# Altium PCB isoUSBtoUART.PcbDoc
Units mm, origin at the board's own origin, x right, y up, seen from the top; angles counter-clockwise.
Board outline 43 x 14 mm, 2 copper layers (Component Side, Bottom Layer), stack 2.38 mm thick; 17 components, 23 nets, 95 pads, 41 vias.
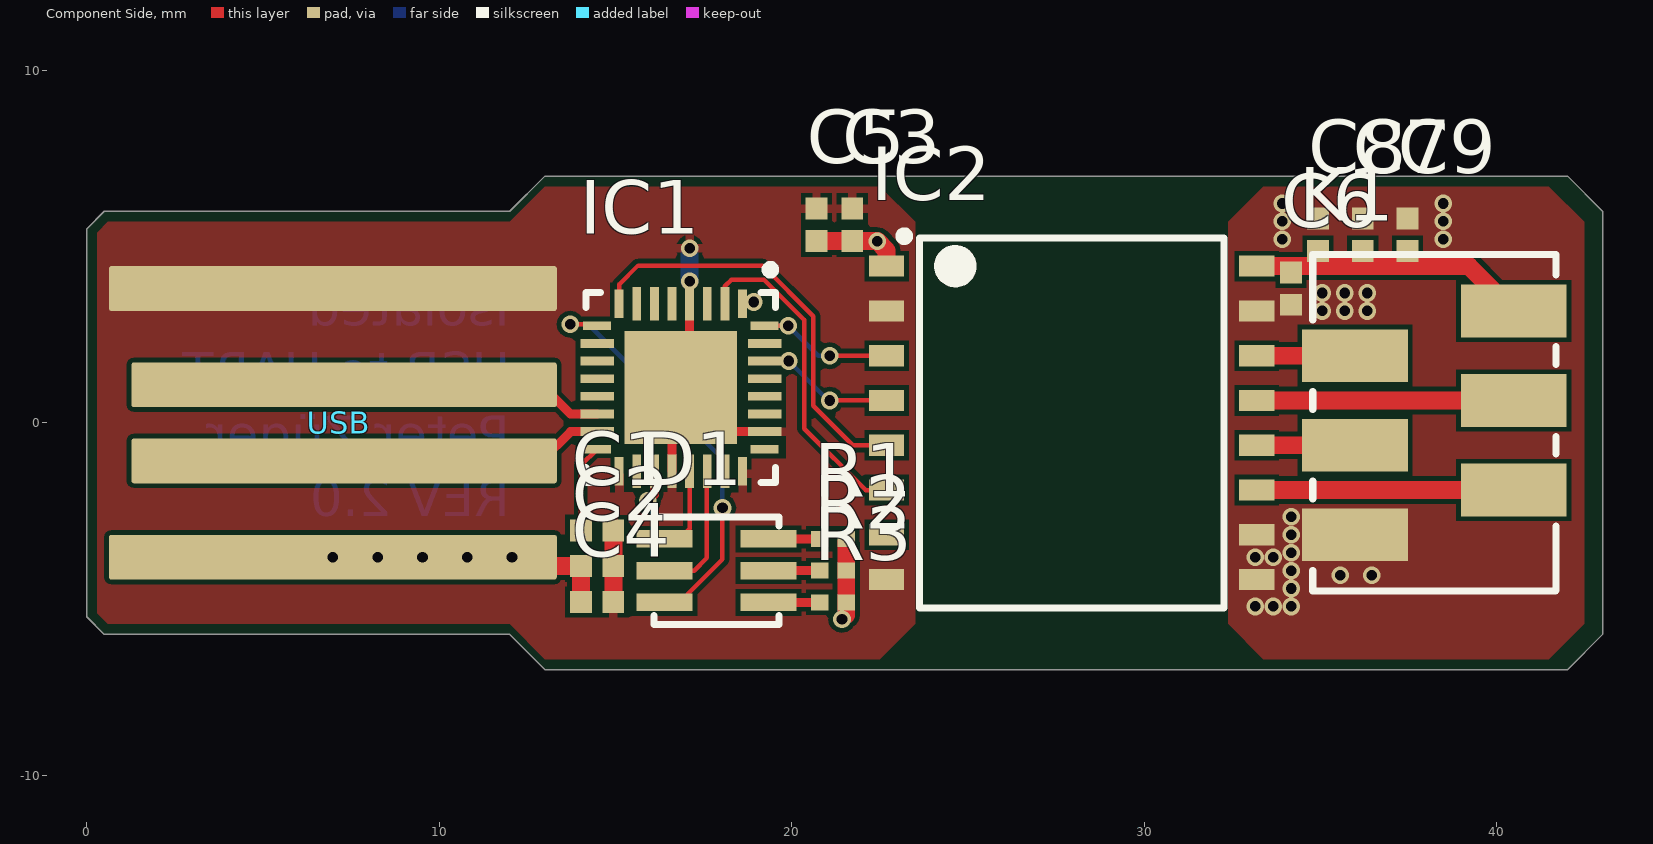
[diagram p0: Component Side view]
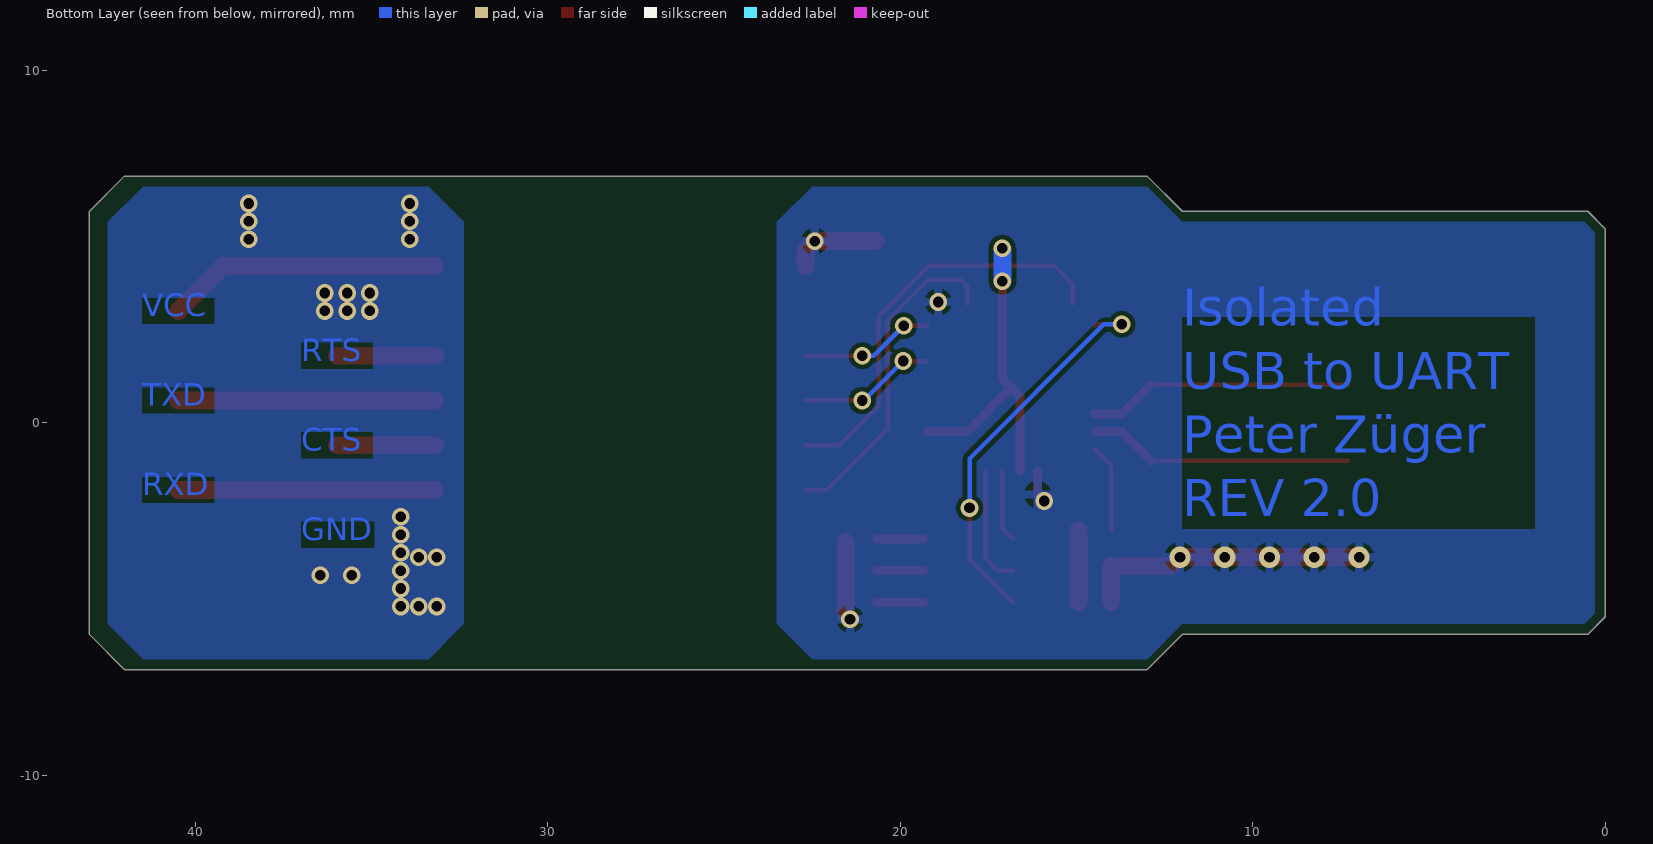
[diagram p1: Bottom Layer view, seen from below]
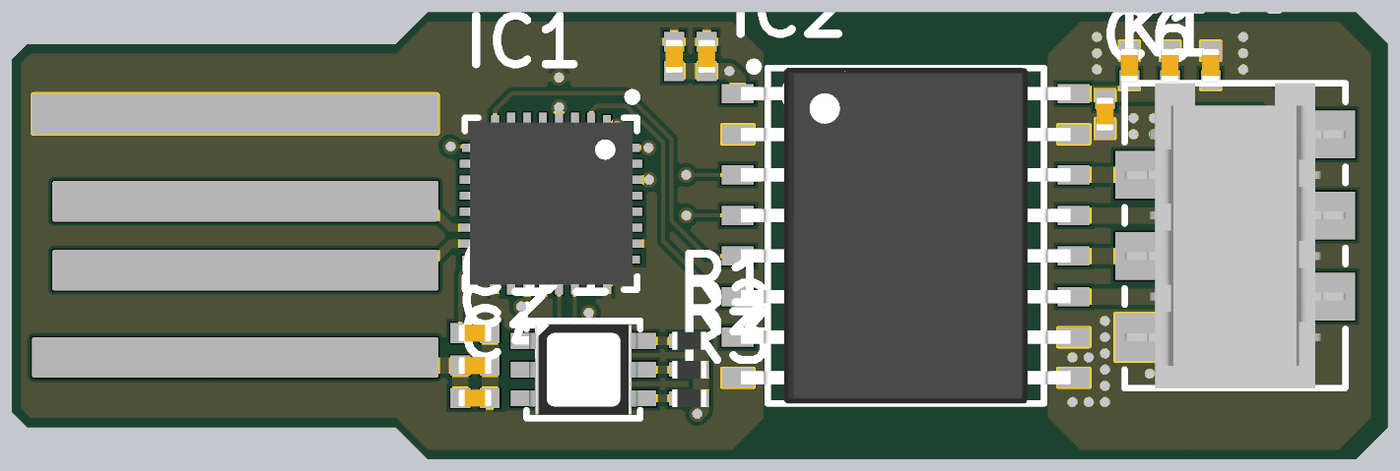
[diagram p2: 3D render of the assembled board from above, using the file's embedded part models]

## Layer stack, top to bottom
Top Solder: solder mask 0.0102, Solder Resist, Dk 3.5
Component Side: signal copper 0.0356
Dielectric 1: core 2.3086, FR-4, Dk 4.2
Bottom Layer: signal copper 0.0356
Solder Side: solder mask 0.0102, Solder Resist, Dk 3.5

## Board outline
0,-5.5 0,5.5 0.5,6 12,6 13,7 42,7 43,6 43,-6 42,-7 13,-7 12,-6 0.5,-6

## Design rules (kind name [scope] priority, off if disabled: settings)
Clearance Clearance_1 [All vs IsText] p1: gap=0 ignorepadtopadclearanceinfootprint=FALSE
Clearance [All] p2: gap=0.127 ignorepadtopadclearanceinfootprint=FALSE
MinimumSolderMaskSliver MinimumSolderMaskSliver_2 [All vs HasFootprint('QFN50P500X500X100_HS-33N')] p1: minsoldermaskwidth=0.035
MinimumSolderMaskSliver MinimumSolderMaskSliver_1 [All vs HasFootprint('BGA20C40P4X5_177X209X62')] p2: minsoldermaskwidth=0
MinimumSolderMaskSliver [All] p3: minsoldermaskwidth=0.127
PlaneConnect [All] p1: planeconnectstyle=Direct reliefexpansion=0.508 reliefentries=4 reliefconductorwidth=0.254 reliefairgap=0.254
PolygonConnect PolygonConnect_2 [InNet('GND_DUT')] p1: connectstyle=Direct reliefconductorwidth=0.254 reliefentries=4 polygonreliefangle="90 Angle" airgapwidth=0.254
PolygonConnect [All vs HasFootprint('USB ON PCB')] p2: connectstyle=Direct reliefconductorwidth=0.254 reliefentries=4 polygonreliefangle="90 Angle" airgapwidth=0.127
PolygonConnect PolygonConnect_1 [All] p3: connectstyle=Relief reliefconductorwidth=0.254 reliefentries=4 polygonreliefangle="90 Angle" airgapwidth=0.127
RoutingVias [All] p1: holewidth=0.3 width=1.27 viastyle="Through Hole" minholewidth=0.3 minwidth=0 maxholewidth=0.5 maxwidth=0.7
SilkToSolderMaskClearance [IsPad] p1: minsilkscreentomaskgap=0 clearancetoexposedcopper=TRUE
SolderMaskExpansion [All] p1: expansion=0.05
Width [All] p1: maxlimit=0.508 minlimit=0.127 preferedwidth=0.254
27 further rules are at their usual default settings.

## Classes and differential pairs
net class Computer: CTS GND NetC1_1 NetD1_4 NetD1_5 NetD1_6 NetIC1_3 NetIC1_6 NetIC1_7 NetIC1_18 NetIC1_27 NetIC1_28 NetIC1_31 PWREN RTS RXD RXLED SLEEP TXD TXDEN TXLED USBDM USBDP VCC
net class DUT: CTS_DUT GND_DUT RTS_DUT RXD_DUT TXD_DUT VCC_DUT

## Components (designator, comment, footprint, x,y, rotation, side; value= is the part's Value field where it differs from the comment)
C1 "Capacitor" CAPC0402X06N 14.478,-3.048 r0 top value=100n
C2 "Capacitor" CAPC0402X06N 14.478,-4.064 r180 top value=100n
C3 "Capacitor" CAPC0402X06N 21.717,5.616 r270 top value=100n
C4 "Capacitor" CAPC0402X06N 14.478,-5.08 r180 top value=10u
C5 "Capacitor" CAPC0402X06N 20.701,5.616 r270 top value=10u
C6 "Capacitor" CAPC0402X06N 34.163,3.81 r90 top value=100n
C7 "Capacitor" CAPC0402X06N 36.195,5.334 r270 top value=100n
C8 "Capacitor" CAPC0402X06N 34.925,5.334 r270 top value=10u
C9 "Capacitor" CAPC0402X06N 37.465,5.334 r270 top value=10u
D1 "RGB LEDA" PLCC6TRICOLLED 17.865,-4.191 r90 top
IC1 "FT232R" QFN50P500X500X100_HS-33N 16.853,1.004 r270 top
IC2 "ISOW7842D" SOIC127P1030X265-16N_ISO 27.94,0 r0 top
K1 "Micro-Match 6P" MICRO_MATCH_6P_FEMALE 38.227,0 r270 top
R1 "Resistor" RESC0402X04L 21.167,-3.291 r180 top value=1k
R2 "Resistor" RESC0402X04L 21.167,-4.191 r180 top value=1k
R3 "Resistor" RESC0402X04L 21.167,-5.091 r180 top value=1k
USB "PCB USB A Male" "USB ON PCB" 0,0 r90 top

## Footprints (in the part's own frame and the unit in brackets; to place one, negate y for a bottom-side part, rotate by r counter-clockwise, add the part's x,y. Pads: shape width x height; smd on the part's side, far side on the other; paste and mask are expansions set on the pad)
CAPC0402X06N [mm] "Chip Capacitor, 2-Leads, Body 1.00x0.50mm, IPC Medium Density"
  rect 0.62x0.62 smd: 1(-0.46,0) 2(0.46,0)
  body extent -0.53,-0.28 0.53,0.28, height 0.55
MICRO_MATCH_6P_FEMALE [mm] "Female Micro-Match connector SMD 6 Pole"
  rect 1.5x3 smd: 1(-3.175,2.25) 2(-1.905,-2.25) 3(-0.635,2.25) 4(0.635,-2.25) 5(1.905,2.25) 6(3.175,-2.25)
  silkscreen extent -4.77,-3.45 4.78,3.45, body extent -4.77,-3.45 4.78,3.45, height 5.2
PLCC6TRICOLLED [mm] "Tricolor Led Package 6 Pin"
  rect 0.5x1.6 smd: 1(0.9,1.475) 2(0,1.475) 3(-0.9,1.475) 4(-0.9,-1.475) 5(0,-1.475) 6(0.9,-1.475)
  silkscreen extent -1.52,-1.78 1.52,1.78, body extent -1.4,-1.7 1.4,1.7, height 1.79
QFN50P500X500X100_HS-33N [mm] "QFN, 32-Leads, Body 5.00x5.00mm, Pitch 0.50mm, Thermal Pad 3.20x3.20mm, IPC Medium Density"
  rect 0.8x0.25 smd: 1(-2.375,1.75) 8(-2.375,-1.75) 17(2.375,-1.75) 24(2.375,1.75)
  rect 0.95x0.25 smd: 2(-2.375,1.25) 3(-2.375,0.75) 4(-2.375,0.25) 5(-2.375,-0.25) 6(-2.375,-0.75) 7(-2.375,-1.25) 18(2.375,-1.25) 19(2.375,-0.75) 20(2.375,-0.25) 21(2.375,0.25) 22(2.375,0.75) 23(2.375,1.25)
  rect 0.25x0.8 smd: 9(-1.75,-2.375) 16(1.75,-2.375) 25(1.75,2.375) 32(-1.75,2.375)
  rect 0.25x0.95 smd: 10(-1.25,-2.375) 11(-0.75,-2.375) 12(-0.25,-2.375) 13(0.25,-2.375) 14(0.75,-2.375) 15(1.25,-2.375) 26(1.25,2.375) 27(0.75,2.375) 28(0.25,2.375) 29(-0.25,2.375) 30(-0.75,2.375) 31(-1.25,2.375)
  rect 3.2x3.2 smd: 33(0,0)
  silkscreen extent -3.46,-2.69 2.69,2.69, body extent -2.55,-2.55 2.55,2.55, height 1
RESC0402X04L [mm] "Chip Resistor, 2-Leads, Body 1.00x0.50mm, IPC High Density"
  rect 0.5x0.45 smd: 1(-0.375,0) 2(0.375,0)
  body extent -0.53,-0.28 0.53,0.28, height 0.4
SOIC127P1030X265-16N_ISO [mm] "SOIC, 16-Leads, Body 10.30x7.50mm, Pitch 1.27mm, IPC Medium Density"
  rect 1x0.6 smd: 1(-5.25,4.445) 2(-5.25,3.175) 3(-5.25,1.905) 4(-5.25,0.635) 5(-5.25,-0.635) 6(-5.25,-1.905) 7(-5.25,-3.175) 8(-5.25,-4.445) 9(5.25,-4.445) 10(5.25,-3.175) 11(5.25,-1.905) 12(5.25,-0.635) 13(5.25,0.635) 14(5.25,1.905) 15(5.25,3.175) 16(5.25,4.445)
  silkscreen extent -4.87,-5.25 4.32,5.42, body extent -5.15,-5.25 5.15,5.25, height 2.65
"USB ON PCB" [mil] "USB on PCB connector"
  rrect10% 50x500 smd: 1(-150,-275) 4(150,-275)
  rrect10% 50x475 smd: 2(-42.5,-287.5) 3(42.5,-287.5)

## Part data
D1: "RGB LED"
IC1: "USB to USART controller"
IC2: "High-Performance, 5000-VRMS Reinforced Quad-Channel Digital Isolators With  Integrated High-Efficiency, Low-Emissions DC-DC Converter"
K1: "6 Pole Micro-Match connector"
USB: "On PCB USB A male connector"

## Free pads (board coordinates)
  round 0 hole 0.3: 0(42.418,-6.858) 0(42.418,6.858) 0(42.672,-6.604) 0(42.672,6.604) 0(42.926,-6.35) 0(42.926,6.35)

## Via types
v1: diameter 0.5, hole 0.3, Component Side to Bottom Layer, tented both sides, 36 vias
v2: diameter 0.6, hole 0.3, Component Side to Bottom Layer, tented bottom, 5 vias

## Nets (pads, with @x,y where several pads share a name; then routed paths per layer and width w, separated by ;. In a path a pad name is that pad's centre, name@x,y a point inside that pad or via, vN(x,y) a via of type N, cw(c..) or ccw(c..) an arc to the next point about the centre after c; other vN are vias at no path point)
CTS: IC1.8 IC2.5 | length 12
  Component Side w0.127: IC1.8 15.103,3.927 15.638,4.462 19.173,4.462 20.61,3.026 20.61,0.485 21.729,-0.635 IC2.5
CTS_DUT: IC2.12 K1.4 | length 2.8
  Component Side w0.508: IC2.12 K1.4
GND: C1.2 C2.1 C3.1 C4.1 C5.1 IC1.4 IC1.17 IC1.20 IC1.24 IC1.26 IC1.33 IC2.2 IC2.8 USB.4 | length 11.5
  Component Side w0.254: IC1.20 16.603,0.754 IC1.33 ; v1(17.103,4.022) IC1.4 17.103,1.254 IC1.33 ; IC1.26 18.103,-0.246 IC1.33
  Component Side w0.508: C4.1 C2.1 C1.2
  Bottom Layer w0.254: v1@17.103,4.911 v1@17.145,4.953
  Bottom Layer w0.508: v1(17.103,4.022) v1@17.103,4.911
  other v1: 17.103,4.953
GND_DUT: C6.1 C7.1 C8.1 C9.1 IC2.9 IC2.10 IC2.15 K1.6
  other v1: 33.147,-5.207 33.655,-5.207 34.163,-5.207 34.163,-4.699 35.56,-4.318 36.449,-4.318 34.163,-4.191 33.147,-3.81 33.655,-3.81 34.163,-3.683 34.163,-3.175 34.163,-2.667 35.052,3.175 35.687,3.175 36.322,3.175 35.052,3.683 35.687,3.683 36.322,3.683 33.909,5.207 38.481,5.207 33.909,5.715 38.481,5.715 33.909,6.223 38.481,6.223
NetC1_1: C1.1 IC1.16 | length 2.5
  Component Side w0.127: C1.1 14.018,-1.206 IC1.16
NetD1_4: D1.4 R3.2 | length 1.3
  Component Side w0.254: D1.4 R3.2@20.678,-5.091
NetD1_5: D1.5 R2.2 | length 1.3
  Component Side w0.254: D1.5 R2.2@20.678,-4.191
NetD1_6: D1.6 R1.2 | length 1.3
  Component Side w0.254: D1.6 R1.2@20.678,-3.291
PWREN: IC1.11
RTS: IC1.32 IC2.3 | length 3.8
  Component Side w0.127: IC1.32 v1(19.899,2.754) ; v1(21.075,1.905) IC2.3
  Bottom Layer w0.127: v1(19.899,2.754) 20.748,1.905 v1(21.075,1.905)
RTS_DUT: IC2.14 K1.2 | length 2.8
  Component Side w0.508: IC2.14 K1.2
RXD: IC1.2 IC2.6 | length 9.4
  Component Side w0.127: IC1.2 18.103,3.879 18.288,4.064 19.212,4.064 20.356,2.92 20.356,-0.163 22.098,-1.905 IC2.6
RXD_DUT: IC2.11 K1.5 | length 7.3
  Component Side w0.508: IC2.11 K1.5
RXLED: D1.1 IC1.21 | length 2
  Component Side w0.127: D1.1@16.813,-3.291 17.103,-3.001 IC1.21
SLEEP: D1.3 IC1.9 | length 11.3
  Component Side w0.127: v1(13.716,2.794) 14.438,2.794 IC1.9 ; D1.3@16.813,-5.091 18.034,-3.87 v1(18.034,-2.413)
  Bottom Layer w0.127: v1(13.716,2.794) 14.224,2.794 18.034,-1.016 v1(18.034,-2.413)
TXD: IC1.30 IC2.4 | length 4
  Component Side w0.127: IC1.30 v1(19.915,1.754) ; v1(21.082,0.635) IC2.4
  Bottom Layer w0.127: v1@19.939,1.778 v1(19.915,1.754) 21.034,0.635 v1(21.082,0.635)
TXD_DUT: IC2.13 K1.3 | length 7.3
  Component Side w0.508: IC2.13 K1.3
TXDEN: IC1.10
TXLED: D1.2 IC1.22 | length 3.4
  Component Side w0.127: D1.2@16.813,-4.191 17.232,-4.191 17.594,-3.83 17.594,-1.38 IC1.22
USBDM: IC1.15 USB.2 | length 7.5
  Component Side w0.127: USB.2 USB.2@12.891,-1.079
  Component Side w0.254: USB.2@12.891,-1.079 13.724,-0.246 IC1.15
USBDP: IC1.14 USB.3 | length 7.5
  Component Side w0.127: USB.3 USB.3@12.89,1.08
  Component Side w0.254: USB.3@12.89,1.08 13.716,0.254 IC1.14
VCC: C2.2 C3.2 C4.2 C5.2 IC1.1 IC1.19 IC2.1 R1.1 R2.1 R3.1 USB.1 | length 13.7
  Component Side w0.254: v1(15.919,-2.216) 16.103,-2.032 IC1.19
  Component Side w0.5: R2.1 R1.1@21.542,-3.391 ; v1@21.542,-5.455 R3.1 R2.1
  Component Side w0.508: v2(6.985,-3.81) v2(8.255,-3.81) v2(9.525,-3.81) v2(10.795,-3.81) v2(12.065,-3.81) 12.319,-4.064 C2.2 C4.2 ; C5.2 C3.2 v1(22.428,5.156) 22.69,4.894 IC2.1
  other v1: 21.423,-5.574 18.923,3.429
VCC_DUT: C6.2 C7.2 C8.2 C9.2 IC2.16 K1.1 | length 7.8
  Component Side w0.508: IC2.16 39.207,4.445 K1.1
pads on no net: IC1.3 IC1.5 IC1.6 IC1.7 IC1.12 IC1.13 IC1.18 IC1.23 IC1.25 IC1.27 IC1.28 IC1.29 IC1.31 IC2.7

## Polygon pours and split planes (outlines as drawn)
GND_DUT on Bottom Layer "GND_DUT_BOT" (solid, pour order 50): 32.377,5.7 33.377,6.7 41.478,6.7 42.478,5.7 42.478,-5.7 41.478,-6.7 33.377,-6.7 32.377,-5.7
VCC on Bottom Layer "VCC_TOP" (solid, pour order 44): 0.6,-5.7 0.3,-5.4 0.3,5.4 0.6,5.7 12,5.7 13,6.7 22.5,6.7 23.5,5.7 23.5,-5.7 22.5,-6.7 13,-6.7 12,-5.7
GND_DUT on Component Side "GND_DUT_TOP" (solid, pour order 48): 32.377,5.7 33.377,6.7 41.478,6.7 42.478,5.7 42.478,-5.7 41.478,-6.7 33.377,-6.7 32.377,-5.7
GND on Component Side "GND_TOP" (solid, pour order 46): 0.6,-5.7 0.3,-5.4 0.3,5.4 0.6,5.7 12,5.7 13,6.7 22.5,6.7 23.5,5.7 23.5,-5.7 22.5,-6.7 13,-6.7 12,-5.7

## Other copper
Bottom Layer:
  text "VCC" at 41.495,2.811 h1.1
  text "RTS" at 36.995,1.541 h1.1
  text "TXD" at 41.495,0.271 h1.1
  text "CTS" at 36.995,-0.999 h1.1
  text "RXD" at 41.495,-2.269 h1.1
  text "Isolated / USB to UART / Peter Züger / REV 2.0" at 12,-3 h1.8
  text "GND" at 36.995,-3.539 h1.1

## Silkscreen, mask and mechanical layers (free items; w line width, h text height)
Mechanical 1:
  lines w0.2: 41.783,7.495 41.783,7.5
  lines w1: 0.3,-6.5 -0.5,-5.7 -0.5,5.7 0.3,6.5 ; 0.5,-6.5 11.8,-6.5 12.8,-7.5 42.2,-7.5 ; 0.5,6.5 11.8,6.5 12.8,7.5 42.2,7.5 ; 41.783,7.495 42.005,7.495 ; 43.5,-6.2 43.5,6.2
Mechanical 13:
  text "Board Thickness:" at 17.371,13.5 h1.52
  text "2.4 (mm)" at 29.309,11.214 h1.52
  text "Size : / 14*42.778mm" at 18.034,11.049 h1.1
Mechanical 15:
  the board outline again, w0.2